# Altium PCB RefPoint01-00.PcbDoc
Units mm, origin at the board's own origin, x right, y up, seen from the top; angles counter-clockwise.
Board outline 52 x 86 mm, 2 copper layers (Top Layer, Bottom Layer); 52 components, 43 nets, 164 pads, 58 vias.
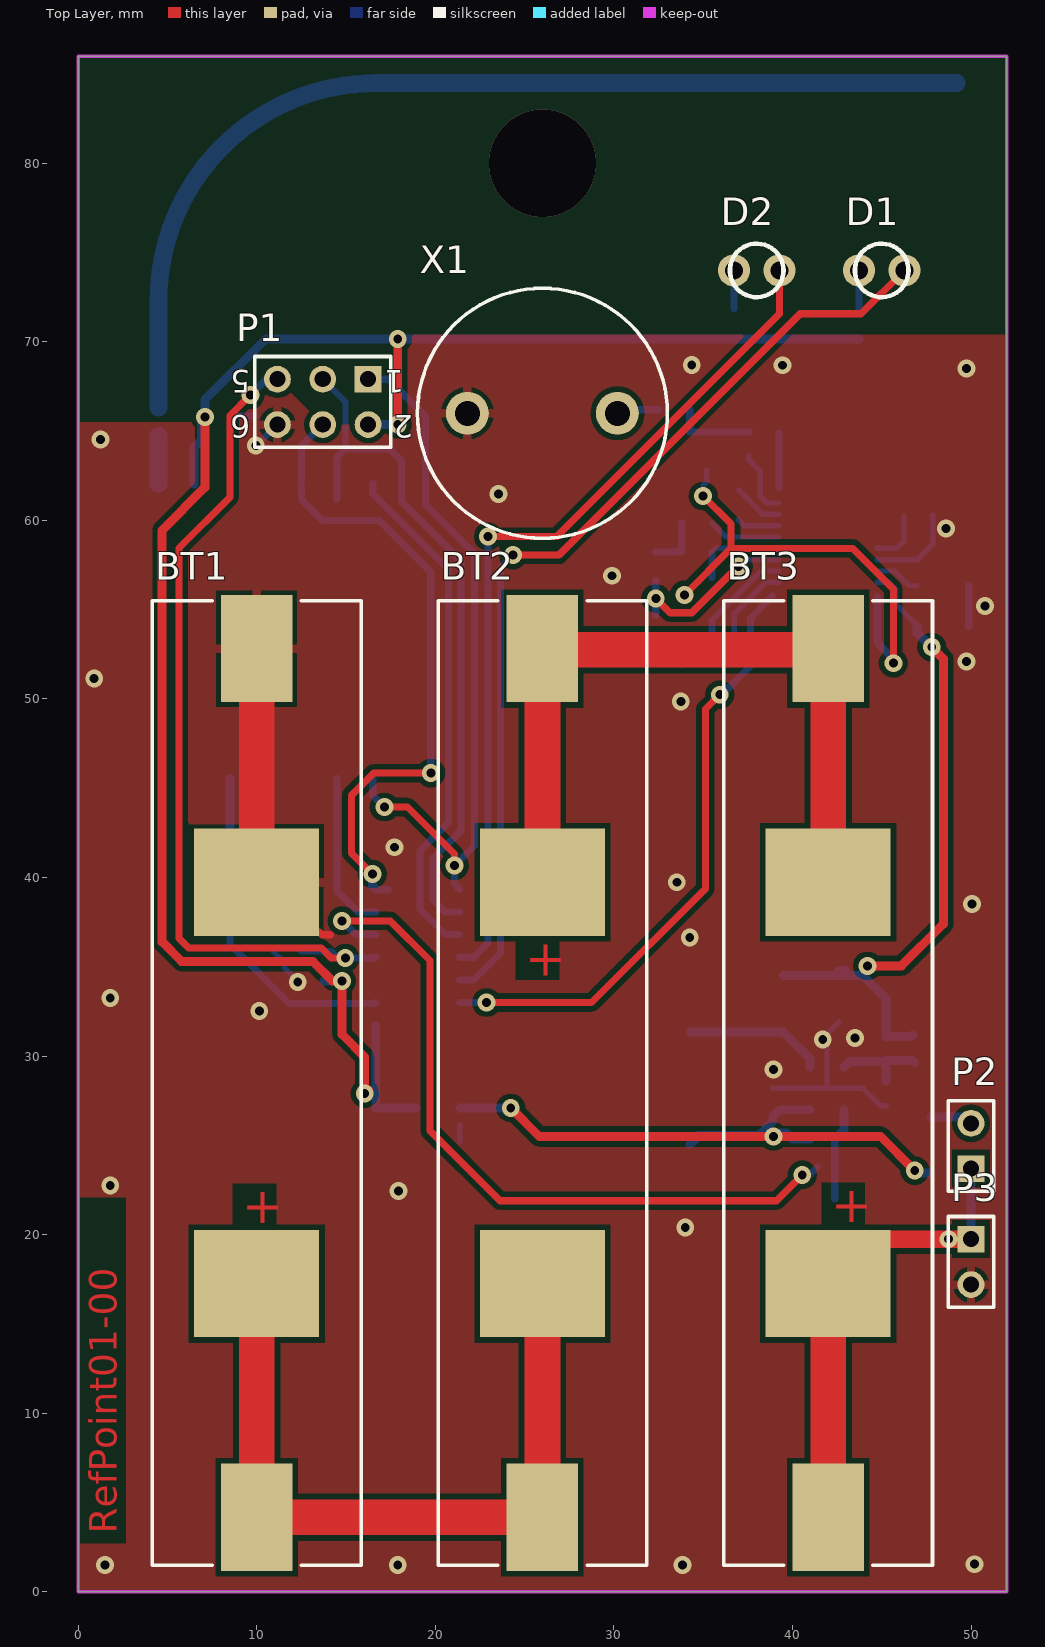
[diagram p0: Top Layer view]
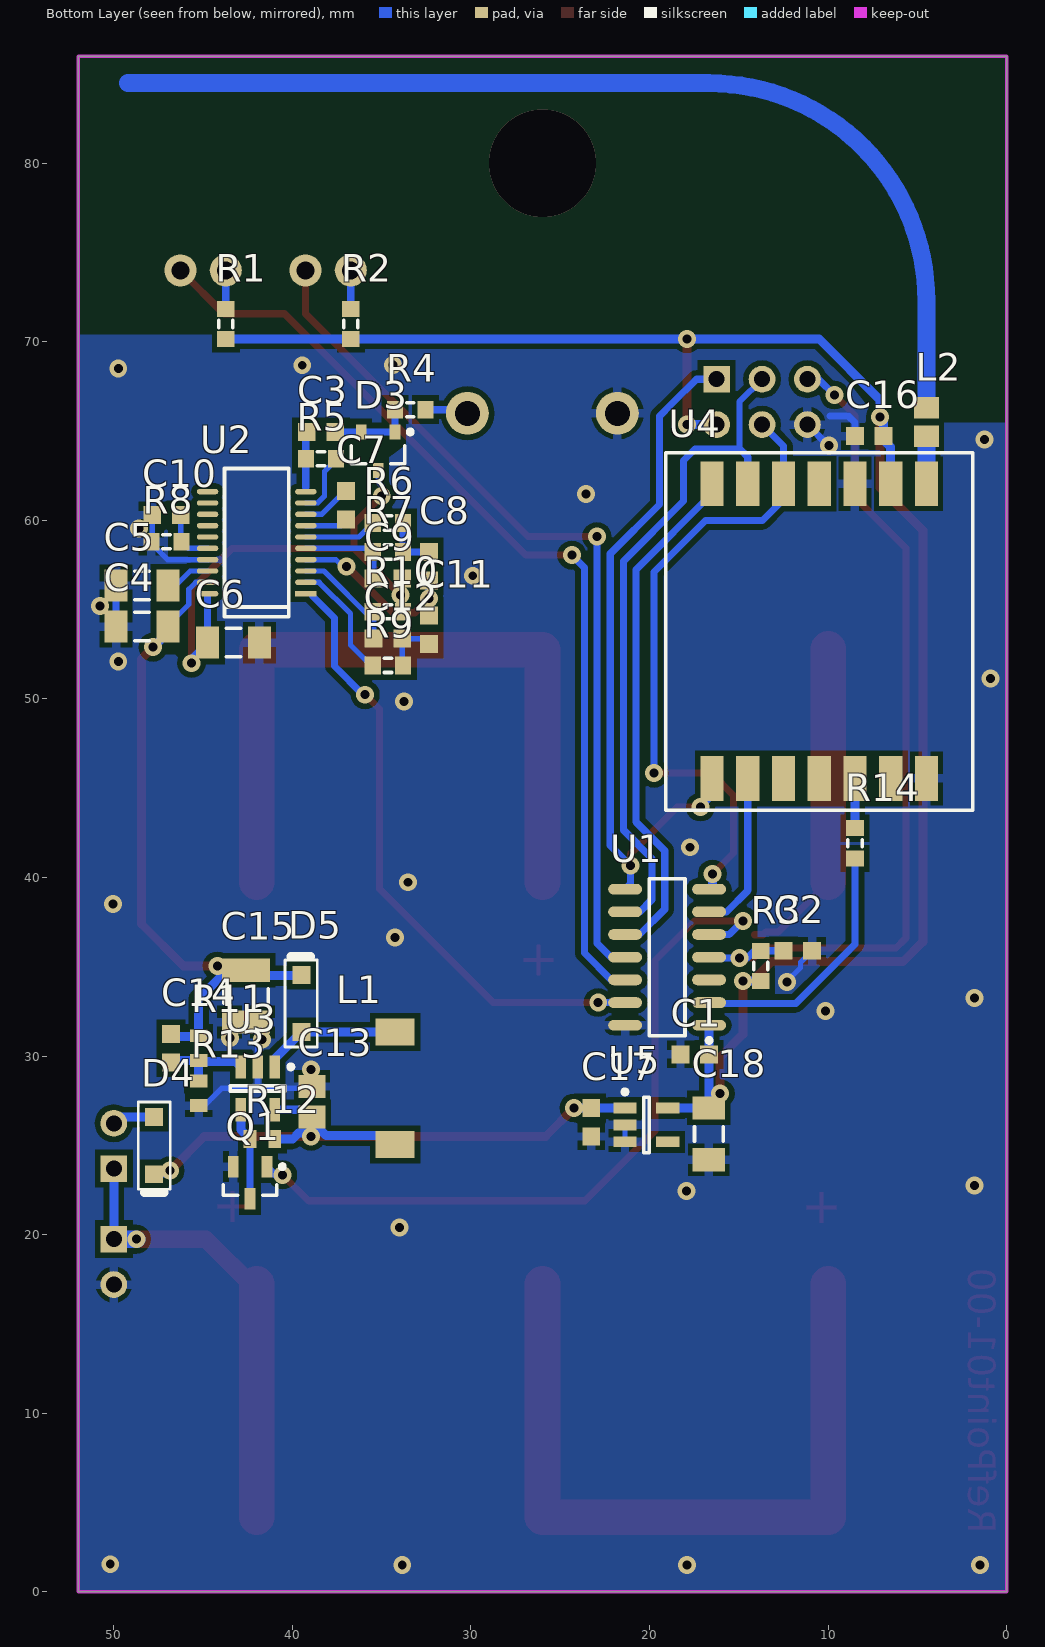
[diagram p1: Bottom Layer view, seen from below]

## Layer stack, top to bottom
Top Solder: solder mask 0.0102, Solder Resist, Dk 3.5
Top Layer: signal copper 0.0356
Dielectric1: dielectric 0.32, FR-4, Dk 4.8
Bottom Layer: signal copper 0.0356
Bottom Solder: solder mask 0.0102, Solder Resist, Dk 3.5

## Board outline
0,0 0,86 52,86 52,0

## Design rules (kind name [scope] priority, off if disabled: settings)
Clearance KeepOut [InPolygon vs OnLayer('Keep-Out Layer')] p1: gap=0.01
Clearance [All] p2: gap=0.3
FabricationTestPointUsage TestPointUsage [All] p1: valid=0 allowmultiple=FALSE
FabricationTestpoint Testpoint [All] p1: side=3 testpointundercomponent=TRUE minsize=1.016 maxsize=2.54 preferedsize=1.524 minholesize=0 maxholesize=1.016 preferedholesize=0.813 testpointgrid=0.025 allowsidetop=TRUE allowsidebottom=TRUE usegrid=TRUE gridtolerance=0
HoleSize [All] p1: absolutevalues=TRUE maxlimit=6 minlimit=0.025 maxpercent=80.000 minpercent=20.000
PolygonConnect PolygonConnect_1 [All vs IsVia] p1: connectstyle=Direct reliefconductorwidth=0.254 reliefentries=4 polygonreliefangle="90 Angle" airgapwidth=0.254
PolygonConnect [All] p2: connectstyle=Relief reliefconductorwidth=0.5 reliefentries=4 polygonreliefangle="90 Angle" airgapwidth=0.254
RoomDefinition RefPoint01-00 [InComponentClass('RefPoint01-00')] p1: confinementstyle=ConfineIn formatcopy=TRUE lockcomponents=FALSE outline -7.25,-9.2 60.35,-9.2 60.35,91.3 -7.25,91.3
RoutingVias [All] p1: holewidth=0.711 width=1.27 viastyle="Through Hole" minholewidth=0.711 minwidth=1.27 maxholewidth=0.711 maxwidth=1.27
SilkToSolderMaskClearance SilkscreenOverComponentPads [IsPad] p1 off: minsilkscreentomaskgap=0.254 clearancetoexposedcopper=TRUE
SolderMaskExpansion [All] p1: expansion=0.102
Width [All] p1: maxlimit=2 minlimit=0.25 preferedwidth=0.4
26 further rules are at their usual default settings.

## Components (designator, comment, footprint, x,y, rotation, side; value= is the part's Value field where it differs from the comment)
BT1 "AAA Battery" "Keystone 55 AAA CLIP" 10,28.5 r270 top locked
BT2 "AAA Battery" "Keystone 55 AAA CLIP" 26,28.5 r90 top locked
BT3 "AAA Battery" "Keystone 55 AAA CLIP" 42,28.5 r270 top locked
C1 "150nF" CAPC1608N 17.466,30.1 r180 bottom
C2 "10pF" CAPC1608N 11.7,35.9 r0 bottom
C3 "470pF" CAPC1608N 38.4,64.954 r180 bottom
C4 "10uF" CAPC3216N 48.42,54.054 r180 bottom
C5 "10uF" CAPC3216N 48.42,56.354 r180 bottom
C6 "10uF" CAPC3216N 43.3,53.154 r0 bottom
C7 "10pF" CAPC1608N 37,60.854 r270 bottom
C8 "2200pF" CAPC1608N 32.35,57.436 r90 bottom
C9 "470pF" CAPC1608N 34.65,56.754 r0 bottom
C10 "4700pF" CAPC1608N 47.05,60.304 r180 bottom
C11 "680pF" CAPC1608N 32.35,53.882 r270 bottom
C12 "680pF" CAPC1608N 34.65,53.382 r0 bottom
C13 "2.2uF" CAPC2012N 38.9,27.45 r270 bottom
C14 "330 pF" CAPC1608N 46.8,30.45 r90 bottom
C15 "4.7uF" CAPC3225N 42.6,33.36 r90 bottom
C16 "150nF" CAPC1608N 7.7,64.719 r180 bottom
C17 "150nF" CAPC1608N 23.264,26.3 r90 bottom
C18 "10uF" CAPC3216N 16.683,25.65 r90 bottom
D1 "LED" "LED 3MM DIP" 45,74 r0 top
D2 "LED" "LED 3MM DIP" 38,74 r0 top
D3 "BAV99" SOT95P240-3L 35.2,63.879 r270 bottom
D4 "BAT42W" SOD123 47.75,24.99 r90 bottom (schematic designator D5)
D5 "BAT42W" SOD123 39.5,32.95 r270 bottom
L1 "22uH" INDM7070x32N 34.25,28.2 r270 bottom
L2 "Inductor" INDC2012L 4.5,65.519 r90 bottom
P1 "AVR ISP" HDR2X3 16.24,67.909 r180 top
P2 "Power Button" HDR1X2 50,23.7 r270 top
P3 "Ex. Source" HDR1X2 50,19.75 r90 top
Q1 "2N7002K" SOT23-3L 42.37,22.91 r270 bottom
R1 "1k5" RESC1608N 43.73,71 r270 bottom
R2 "1k5" RESC1608N 36.73,71 r270 bottom
R3 "10k" RESC1608N 13.777,35.05 r270 bottom
R4 "3k9" RESC1608N 33.4,66.2 r180 bottom
R5 "300k" RESC1608N 38.4,63.454 r0 bottom
R6 "4k7" RESC1608N 34.65,59.854 r0 bottom
R7 "4k7" RESC1608N 34.65,58.236 r0 bottom
R8 "4k7" RESC1608N 47.05,58.804 r180 bottom
R9 "2k7" RESC1608N 34.65,51.882 r180 bottom
R10 "13k" RESC1608N 34.65,54.882 r180 bottom
R11 "51k" RESC1608X50N 45.25,30.45 r270 bottom
R12 "51k" RESC1608X50N 41.68,25.36 r0 bottom
R13 "13k3" RESC1608X50N 45.25,27.92 r90 bottom
R14 "33R" RESC1608N 8.5,41.919 r90 bottom
U1 "ATtiny24A-SSU" SOIC14T_L 19.016,35.54 r0 bottom
U2 "PW0268" QSSOP20_0.635/4.0X8.7 42,58.754 r90 bottom
U3 "LMR62014" SOT23-5AM 41.94,28.2 r270 bottom
U4 "ALPHA-TRX433S" ALPHA-TRX 10.5,53.8 r180 bottom locked
U5 "TPS76933" SOT23-5AM 20.177,26.15 r180 bottom
X1 "Xduct" XDUCTS1 26,66 r180 top

## Footprints (in the part's own frame and the unit in brackets; to place one, negate y for a bottom-side part, rotate by r counter-clockwise, add the part's x,y. Pads: shape width x height; smd on the part's side, far side on the other; paste and mask are expansions set on the pad)
ALPHA-TRX [mm] "ALPHA RF MODULES"
  rect 1.3x2.5 smd: 1(-6,-8.25) 2(-4,-8.25) 3(-2,-8.25) 4(0,-8.25) 5(2,-8.25) 6(4,-8.25) 7(6,-8.25) 8(6,8.25) 9(4,8.25) 10(2,8.25) 11(0,8.25) 12(-2,8.25) 13(-4,8.25) 14(-6,8.25)
  silkscreen extent -8.6,-10.03 8.6,10
CAPC1608N [mm] "Chip Capacitor, Body 1.6x0.8mm(0603), IPC Medium Density"
  rect 1x1 smd: 1(-0.8,0) 2(0.8,0)
  body extent -0.8,-0.4 0.8,0.4, height 0.55
CAPC2012N [mm] "Chip Capacitor, Body 2.0x1.3mm(C0805), IPC Medium Density"
  rect 1.3x1.5 smd: 1(-0.85,0) 2(0.85,0)
  body extent -1.1,-0.73 1.1,0.73, height 1.1
CAPC3216N [mm] "Chip Capacitor, Body 3.2x1.6mm, IPC Medium Density"
  rect 1.3x1.8 smd: 1(-1.45,0) 2(1.45,0)
  silkscreen extent -0.4,-0.8 0.4,0.8, body extent -1.6,-0.8 1.6,0.8, height 0.7
CAPC3225N [mm] "Chip Capacitor, Body 3.2x2.5mm, IPC Medium Density"
  rect 1.3x2.7 smd: 1(-1.45,0) 2(1.45,0)
  silkscreen extent -0.4,-1.25 0.4,1.25, body extent -1.7,-1.35 1.7,1.35, height 1.35
HDR1X2 [mm] "Connector; Header; 2 Position"
  rect 1.5x1.5 hole 0.9: 1(0,0)
  round 1.5 hole 0.9: 2(-2.54,0)
  silkscreen extent -3.81,-1.27 1.27,1.27
HDR2X3 [mm] "Connector; Header; 3x2 Position"
  rect 1.5x1.5 hole 0.9: 1(0,0)
  round 1.5 hole 0.9: 2(0,2.54) 3(2.54,0) 4(2.54,2.54) 5(5.08,0) 6(5.08,2.54)
  silkscreen extent -1.27,-1.27 6.35,3.81
INDC2012L [mm] "Chip Inductor, Body 2.0x1.2mm, IPC High Density"
  rect 1.2x1.4 smd: 1(-0.8,0) 2(0.8,0)
  body extent -1.1,-0.7 1.1,0.7, height 1.1
INDM7070x32N [mm] "Inductor 7x7x3.2mm"
  rect 1.5x2.2 smd: 1(-3.15,0) 2(3.15,0)
"Keystone 55 AAA CLIP" [mm] "KEYSTONE 55 BATTERY CLIP AAA"
  rect 6x4 smd: 1(-24.32,0) 2(24.32,0)
  rect 6x7 smd: 1(-11.24,0) 2(11.24,0)
  silkscreen extent -27,-5.84 27,5.84, body extent -26.29,-5.57 26.29,5.57, height 13.19
"LED 3MM DIP" [mm]
  round 1.8 hole 1: 1(-1.27,0) 2(1.27,0)
  silkscreen extent -1.5,-1.5 1.5,1.5, body extent -1.58,-1.75 1.75,1.75, height 6.51
QSSOP20_0.635/4.0X8.7 [mm]
  rect 0.3x1.2 smd paste-0.02 mask+0.05: 1(-2.857,-2.75)
  oval 0.3x1.2 smd paste-0.02 mask+0.05: 2(-2.222,-2.75) 3(-1.588,-2.75) 4(-0.953,-2.75) 5(-0.318,-2.75) 6(0.317,-2.75) 7(0.952,-2.75) 8(1.587,-2.75) 9(2.222,-2.75) 10(2.857,-2.75) 11(2.857,2.75) 12(2.222,2.75) 13(1.588,2.75) 14(0.953,2.75) 15(0.318,2.75) 16(-0.317,2.75) 17(-0.952,2.75) 18(-1.587,2.75) 19(-2.222,2.75) 20(-2.857,2.75)
  silkscreen extent -4.15,-1.8 4.15,1.8, body extent -4.15,-2.05 4.15,2.05, height 1.75
RESC1608N [mm] "Chip Resistor, Body 1.6x0.8mm, IPC Medium Density"
  rect 0.9x1 smd: 1(-0.85,0) 2(0.85,0)
  silkscreen extent -0.2,-0.4 0.2,0.4, body extent -0.8,-0.4 0.8,0.4, height 0.38
RESC1608X50N [mm] "Chip Resistor, EIA 0603, Metric 1608, Body 1.6x0.8mm, IPC Medium Density"
  rect 0.72x0.99 smd: 1(-0.69,0) 2(0.69,0)
  body extent -0.87,-0.47 0.88,0.48, height 0.5
SOD123 [mm]
  rect 1x1 smd paste-0.02 mask+0.05: 1(1.6,0) 2(-1.6,0)
  silkscreen extent -2.63,-0.91 2.44,0.89, body extent -1.95,-0.9 1.95,0.9, height 1.29
SOIC14T_L [mm] "14-Pin Small Outline Integrated Circuit 1.27 mm Pitch, IPC High Density"
  oval 1.9x0.6 smd: 1(-2.35,3.81) 2(-2.35,2.54) 3(-2.35,1.27) 4(-2.35,0) 5(-2.35,-1.27) 6(-2.35,-2.54) 7(-2.35,-3.81) 8(2.35,-3.81) 9(2.35,-2.54) 10(2.35,-1.27) 11(2.35,0) 12(2.35,1.27) 13(2.35,2.54) 14(2.35,3.81)
  silkscreen extent -2.47,-4.4 1,4.78, body extent -1.95,-4.33 1.95,4.33, height 1.91
SOT23-3L [mm] "SOT23, 3-Leads, Body 2.9x1.3mm, Pitch 0.95mm, Lead Span 2.5mm, IPC High Density"
  rect 1.2x0.6 smd: 1(-0.9,0.95) 2(-0.9,-0.95) 3(0.9,0)
  silkscreen extent -1.02,-1.5 0.7,1.92, body extent -1.32,-1.5 1.32,1.5, height 1.08
SOT23-5AM [mm] "SOT23, 5-Leads, Body 2.9x1.7mm, Pitch 0.95mm, Lead Span 2.8mm, IPC Low Density"
  rect 1.3x0.6 smd: 1(-1.2,0.95) 2(-1.2,0) 3(-1.2,-0.95) 4(1.2,-0.95) 5(1.2,0.95)
  silkscreen extent -1.32,-1.55 0.15,1.97, body extent -0.9,-1.55 0.9,1.55, height 1.45
SOT95P240-3L [mm] "SOT23, 3-Leads, Body 2.9x1.3mm, Pitch 0.95mm, Lead Span 2.4mm, IPC High Density"
  rect 0.85x0.6 smd: 1(-1.075,0.95) 2(-1.075,-0.95) 3(1.075,0)
  silkscreen extent -1.2,-1.5 0.7,1.92, body extent -0.7,-1.5 0.7,1.5, height 1.12
XDUCTS1 [mm] "400ST/R120"
  round 2.4 hole 1.4: 1(-4.2,0) 2(4.2,0)
  silkscreen extent -7,-7 7,7, body extent -6.35,-6.35 6.35,6.35, height 20

## Part data
BT1 BT2 BT3: library part Battery_AAA, "Battery AAA"
C1 C16 C17: library part C0000001, "MLCC, 150nF 16V -20+80% Y5V"
C2 C7: library part C0000042, "MLCC, 0603, NP0, 50V, 10PF"
C3 C9: library part C0000062, "MLCC, 470pF 50V C0G 5% 0603"
C4 C5 C6 C18: library part C0000011, "MLCC, 10uF 25V -20%, +80% Y5V 1206"
C8: library part C0000126, "MLCC, 2200pF 50V X7R 5% 0603"
C10: library part C0000127, "MLCC, 4700pF 50V X7R 5% 0603"
C11 C12: library part C0000125, "MLCC, 680pF 50V C0G / NP0 5% 0603"
C13: library part C0000129, "MLCC, 2.2uF 16V X7R 0805"
C14: library part C0000018, "MLCC, 50V, 330pF, 10%, X7R, 0603"
C15: library part C0000130, "MLCC, 4.7uF 16V X7R 1210"
D1 D2: library part LED0, "Typical INFRARED GaAs LED"
D3: library part D0000001, "DIODE SW DUAL 75V 350mW SOT23"
D4 D5: library part D0000003, "Diode Schottkey, 30V, Vf=1V, If=1A, rrt=5ns, SOD123, -55°C to +125°C"
L1: library part "L Inductor 810-SLF732220MR962PF", "Inductor"
P1: "Header, 6-Pin"
P2: "Header, 2-Pin, Right Angle"
P3: library part Maitinimas, "Header, 2-Pin"
Q1: library part Q0000008, "MOSFET N-CH 60V 340MA SOT23"
R1 R2: library part R2406076, "1K5 5% 0603 1/10W"
R3: library part R0000008, "Res, 10K 0.063W 75V 1%  0603"
R4: library part R2406086, "3K9 5% 0603 1/10W"
R5: library part R2406131, "300K 5% 0603 1/10W"
R6 R7 R8: library part R2406088, "Res, 4K7 5% 0603 1/10W"
R9: library part R2406082, "2K7 5% 0603 1/10W"
R10: library part R2406099, "13K 5% 0603 1/10W"
R11 R12: library part R0000522, "Res, 51K, 0603 (1608 metric), ±1%, 100mW, 75V"
R13: library part R0000455, "Res, 13K3, 0603 (1608 metric), ±1%, 100mW, 75V"
R14: library part R2406036, "33R 5% 0603 1/10W"
U3: "2064695"
U4: "RF SOLUTIONS  ALPHA-TRX433S  RF MODULE, TRANSCEIVER, FSK, 433MHZ"
U5: library part TPS769xx, "ULTRALOW-POWER 100-mA LOW-DROPOUT LINEAR REGULATORS"
X1: library part Xduct1, "Transducer"

## Via types
v1: diameter 1, hole 0.5, Top Layer to Bottom Layer, 57 vias
v2: diameter 6, hole 6, Top Layer to Bottom Layer, 1 vias

## Nets (pads, with @x,y where several pads share a name; then routed paths per layer and width w, separated by ;. In a path a pad name is that pad's centre, name@x,y a point inside that pad or via, vN(x,y) a via of type N, cw(c..) or ccw(c..) an arc to the next point about the centre after c; other vN are vias at no path point)
+3.3V: C1.2 C16.2 C18.2 P1.2 R1.2 R2.2 R3.2 U1.1 U4.9 U5.5 | length 105.5
  Top Layer w0.5: v1(7.1,65.8) 7.1,61.85 4.7,59.45 4.7,36.4 5.8,35.3 13.152,35.3 14.252,34.2 v1(14.777,34.2) 14.777,31.223 16.05,29.95 16.05,28.3 v1@16.25,28.1 ; v1(17.9,65.369) v1(17.9,70.159)
  Bottom Layer w0.5: U4.9 6.5,64.1 6.9,64.5 C16.2 6.9,65.6 v1(7.1,65.8) 7.1,66.75 10.509,70.159 v1(17.9,70.159) 36.721,70.159 R2.2 R1.2 ; R3.2 v1(14.777,34.2) ; P1.2 v1(17.9,65.369) ; U1.1 16.666,27.127 16.639,27.1 C18.2 U5.5@18.927,27.1
  other v1: 16.05,27.9
+4.5V: C13.2 C17.2 D4.2 L1.2 R12.1 U3.5 U5.1 | length 38
  Top Layer w0.5: v1(24.227,27.1) 25.827,25.5 v1(38.95,25.5) 44.94,25.5 v1(46.85,23.59)
  Bottom Layer w0.5: U5.1 v1(24.227,27.1) ; L1.2 34.75,25.55 38.1,25.55 C13.2@38.9,26.35 ; C13.2 39.3,27 U3.5 ; v1(38.95,25.5) 38.75,25.7 39.65,25.7 39.99,25.36 R12.1 ; v1@46.836,23.45 47.69,23.45 D4.2@47.74,23.4
+6V: C4.2 C14.2 C15.2 D5.2 R11.1 U2.19 | length 36.3
  Top Layer w0.5: v1(44.2,35.05) 46.1,35.05 48.45,37.4 48.45,52.254 v1(47.8,52.904)
  Bottom Layer w0.3: U2.19 45.414,56.531 45.8,56.145 45.8,55.304 C4.2@46.82,54.284
  Bottom Layer w0.5: D5.2@39.5,34.51 43.95,34.51 45.25,33.21 45.25,31.09 46.64,31.09 C14.2@46.75,31.2 ; C15.2 C15.2@42.96,34.81 ; C4.2 46.97,53.734 v1(47.8,52.904)
CLK: R14.1 U1.2 | length 14.4
  Bottom Layer w0.4: R14.1 8.5,36.263 11.813,32.95 16.616,32.95 U1.2
GND: BT1.1 C1.1 C2.1 C4.1 C5.1 C6.1 C10.1 C13.1 C15.1 C16.1 C17.1 C18.1 P1.6 P3.2 Q1.2 R8.1 R13.1 U1.14 U2.17 U3.2 U4.7 U4.10 U5.2 U5.3 X1.2 | length 43.9
  Top Layer w0.4: BT1.1@10,39.74 12.79,36.95 13.5,36.95 13.654,36.796 14.123,36.796
  Top Layer w2: BT1.1@10,39.74 BT1.1@10,52.82
  Bottom Layer w0.3: C2.1 11.55,35.25 11.55,34.95 12.3,34.2 v1(12.3,34.15) ; U5.3 U5.2 ; C13.1@38.9,28.2 41.94,28.2 ; C15.1 41.94,31.25 U3.2 41.94,28.2 ; U2.17 46.997,57.801 47.9,58.704 47.85,58.754 C10.1 ; R13.1 44.93,27.23 43.96,28.2 41.94,28.2
  Bottom Layer w0.4: C16.1 8.5,65.477 8.873,65.85 9.89,65.85 ; v1(9.95,64.2) 9.991,64.2 P1.6 ; C4.1 C5.1
  other v1: 1.5,1.5 17.9,1.5 33.85,1.5 50.2,1.55 34,20.4 17.941,22.45 1.8,22.75 38.95,29.26 41.7,30.925 43.5,31.01 10.146,32.529 1.8,33.25 34.25,36.65 50.05,38.511 33.525,39.74 17.727,41.7 33.75,49.85 0.9,51.15 49.75,52.1 50.774,55.2 29.9,56.9 48.6,59.554 23.55,61.474 1.25,64.529 49.75,68.5 34.364,68.7 39.45,68.689
MISO: P1.1 U1.8 U4.1 | length 39.8
  Top Layer w0.4: v1(17.15,43.95) 18.45,43.95 21.077,41.323 v1(21.077,40.669)
  Bottom Layer w0.4: P1.1 17.374,67.909 18.743,66.54 19.45,65.833 19.45,60.886 22.2,58.136 22.2,41.792 v1(21.077,40.669) 21.077,39.639 U1.8 ; U4.1 16.5,44.6 v1(17.15,43.95)
MOSI: P1.4 U1.7 U4.12 | length 36.1
  Top Layer w0.4: v1(16.477,40.201) 15.3,41.378 15.3,44.6 16.55,45.85 v1(19.75,45.85)
  Bottom Layer w0.4: U4.12@12.5,61.75 12.5,61.168 13.668,60 16.864,60 19.75,57.114 v1(19.75,45.85) ; U4.12 12.5,64.169 P1.4 ; U1.7@16.697,39.32 U1.7@17.385,39.32
  Bottom Layer w0.5: v1(16.477,40.201) 16.477,39.539 U1.7
NetBT1_2: BT1.2 BT2.1 | length 42.2
  Top Layer w2: BT1.2@10,17.26 10,4.18 26,4.18 BT2.1@26,17.26
NetBT2_2: BT2.2 BT3.1 | length 42
  Top Layer w2: BT2.2@26,39.74 26,52.763 42,52.763 BT3.1@42,39.74
NetC3_1: C3.1 R5.2 U2.10 | length 3.1
  Bottom Layer w0.4: 39.25,61.834 R5.2 C3.1@39.25,64.904
NetC3_2: C3.2 D3.1 D3.2 R4.1 | length 4.6
  Bottom Layer w0.4: R4.1 D3.1 D3.2 C3.2
NetC7_1: C7.1 U2.8 | length 2.8
  Bottom Layer w0.3: C7.1@36.997,61.707 38.363,60.341 U2.8
NetC7_2: C7.2 U2.7 | length 2.4
  Bottom Layer w0.3: C7.2@36.975,60.029 37.298,59.706 U2.7
NetC8_1: C8.1 C11.1 U2.4 | length 10.4
  Top Layer w0.4: v1(32.35,55.632) 33.15,54.832 34.364,54.832 36.962,57.429 v1(36.975,57.429)
  Bottom Layer w0.3: v1(36.975,57.429) 37.199,57.429 37.571,57.801 U2.4
  Bottom Layer w0.4: C11.1 v1(32.35,55.632) C8.1@32.35,56.632
NetC8_2: C8.2 R6.1 R7.1 | length 3
  Bottom Layer w0.4: C8.2 R7.1 ; R7.1@33.8,58.336 R6.1
NetC9_2: C9.2 R7.2 U2.5 | length 5.5
  Bottom Layer w0.3: C9.2 C9.2@35.5,56.804 ; R7.2@35.6,58.336 R7.2 35.7,58.436 U2.5
  Bottom Layer w0.4: C9.2@35.5,56.804 R7.2
NetC10_2: C10.2 R8.2 U2.16 | length 3
  Bottom Layer w0.3: U2.16 45.832,58.436 46.25,58.854 C10.2@46.25,60.204
NetC11_2: C11.2 C12.1 R9.2 | length 3.2
  Bottom Layer w0.3: C11.2 32.65,53.382 C12.1 C12.1@33.85,53.132 ; R9.2 33.85,51.932 C12.1@33.85,53.132 ; C12.1@33.8,53.182 C12.1@33.85,53.132
NetC12_2: C12.2 R10.1 U2.3 | length 5.9
  Bottom Layer w0.3: R10.1@35.5,54.432 38.235,57.166 U2.3
  Bottom Layer w0.4: C12.2@35.5,53.382 R10.1@35.5,54.432
NetC14_1: C14.1 R11.2 R13.2 U3.3 | length 5.2
  Bottom Layer w0.5: U3.3 43.2,29.71 R11.2@45.25,29.71 ; R13.2 R11.2@45.25,29.71 ; C14.1 46.69,29.76 R11.2 R11.2@45.25,29.71
NetD1_1: D1.1 R1.1 | length 2.1
  Bottom Layer w0.4: R1.1 D1.1
NetD1_2: D1.2 U1.12 | length 54
  Top Layer w0.4: v1(24.35,58.054) 26.919,58.054 40.435,71.57 43.84,71.57 D1.2
  Bottom Layer w0.4: U1.12 22.147,34.27 23.65,35.773 23.65,57.354 v1(24.35,58.054)
NetD2_1: D2.1 R2.1 | length 2.2
  Bottom Layer w0.4: R2.1 D2.1
NetD2_2: D2.2 U1.11 | length 48.8
  Top Layer w0.4: v1(22.95,59.1) 26.8,59.1 39.27,71.57 D2.2
  Bottom Layer w0.4: U1.11 22.167,35.54 22.95,36.323 v1@22.95,59.304
NetD4_1: D4.1 P2.2 | length 2.5
  Bottom Layer w0.5: D4.1 P2.2@50.2,26.59
NetD5_1: D5.1 L1.1 U3.1 | length 7.8
  Bottom Layer w0.5: L1.1 D5.1 40.99,29.86 U3.1
NetE1_1: L2.2 | length 57.6
  Bottom Layer w1: L2.2 4.5,72.315 cw(c16.663,72.315) 16.663,84.479 ; 16.663,84.5 49.2,84.5
NetL2_1: L2.1 U4.8 | length 2.7
  Bottom Layer w1: U4.8 L2.1
NetQ1_3: Q1.3 R12.2 U3.4 | length 5.2
  Bottom Layer w0.4: Q1.3 R12.2
  Bottom Layer w0.5: R12.2 42.89,25.88 U3.4
NetR4_2: R4.2 X1.1 | length 2.6
  Bottom Layer w0.4: X1.1@30.2,65.6 30.8,66.2 R4.2
NetR5_1: R5.1 U2.9 | length 3.7
  Bottom Layer w0.3: R5.1@37.55,63.604 37.55,63.4 38.2,62.75 38.2,61.363 38.586,60.976 U2.9
NetR6_2: R6.2 U2.6 | length 4.1
  Bottom Layer w0.3: R6.2 36.283,59.071 U2.6
NetR9_1: R9.1 U2.2 | length 6.7
  Bottom Layer w0.3: R9.1 35.575,51.957 35.675,51.957 36.75,53.032 36.75,54.783 38.499,56.531 U2.2
NetR14_2: R14.2 U4.5 | length 2.8
  Bottom Layer w0.5: R14.2 U4.5
NIRQ: U1.6 U4.2 | length 8.9
  Bottom Layer w0.4: U4.2 14.5,39.266 15.686,38.08 U1.6
NSEL: U1.10 U4.14 | length 29
  Bottom Layer w0.4: U4.14 16.5,61.5 20.75,57.25 20.75,43.103 19.15,41.503 19.15,38.227 20.567,36.81 U1.10
PW0268: U1.13 U2.1 | length 34.4
  Top Layer w0.4: v1(22.877,33) 28.75,33 35.125,39.375 35.125,49.436 v1(35.93,50.241)
  Bottom Layer w0.4: U1.13 v1(22.877,33) ; v1(35.93,50.241) 36.046,50.241 37.65,51.845 37.65,54.541 U2.1@38.874,55.765
RST: C2.2 P1.5 R3.1 U1.4 | length 48.1
  Top Layer w0.4: v1(9.644,67.019) 8.5,65.875 8.5,61.3 5.65,58.45 5.65,36.6 6.198,36.052 13.627,36.052 14.179,35.5 v1(14.963,35.5) v1@14.861,35.602
  Bottom Layer w0.4: v1(9.644,67.019) 10.534,67.909 P1.5 ; C2.2 R3.1@13.727,35.9 ; R3.1@13.777,35.85 14.177,35.85 14.527,35.5 v1(14.963,35.5) 16.626,35.5 U1.4
SCK: P1.3 U1.9 U4.13 | length 39.3
  Bottom Layer w0.35: P1.3 14.97,66.639 14.97,64.03 14.94,64
  Bottom Layer w0.4: U4.13@14.5,61.2 U4.13 14.5,63.56 14.94,64 17.45,64 18.1,63.35 18.1,61.079 21.45,57.729 21.45,42.65 19.873,41.073 19.873,38.754 20.547,38.08 U1.9
SHDN: Q1.1 U1.5 | length 41.7
  Top Layer w0.4: v1(14.777,37.575) 17.481,37.575 19.7,35.356 19.7,25.823 23.623,21.9 39.1,21.9 v1(40.55,23.35)
  Bottom Layer w0.4: v1(14.777,37.575) 15.542,36.81 U1.5 ; v1(40.55,23.35) 40.96,23.35 Q1.1@41.41,23.8
VCC: BT3.2 P2.1 P3.1 | length 26.9
  Top Layer w1: BT3.2@42,16.9 44.85,19.75 v1@48.65,19.75 ; v1(48.73,19.75) P3.1
  Top Layer w2: BT3.2@42,4.18 BT3.2@42,17.26
  Bottom Layer w0.5: P3.1 P2.1@50,23.2
  Bottom Layer w1: v1(48.73,19.75) P3.1
VREF: C6.2 C9.1 D3.3 R10.2 U2.20 | length 27.1
  Top Layer w0.4: v1(33.95,55.832) 36.555,58.436 ; v1(35,61.363) 36.555,59.808 36.555,58.436 ; v1(45.65,52.004) 45.65,56.155 43.368,58.436 36.555,58.436
  Bottom Layer w0.3: v1(35,61.363) 35,61.95 35.2,62.15 D3.3
  Bottom Layer w0.4: 44.75,55.739 C6.2 45.65,52.254 v1(45.65,52.004)
VREG: C5.2 U2.18 | length 2.6
  Bottom Layer w0.3: U2.18 45.72,57.166 46.532,56.354 C5.2
pads on no net: U1.3 U2.11 U2.12 U2.13 U2.14 U2.15 U4.3 U4.4 U4.6 U4.11 U5.4
copper on no net:
  other v2: 26,80

## Polygon pours and split planes (outlines as drawn)
GND on Top Layer "Top Layer GND" (solid, remove dead copper, pour order 0): 0,0 0,65.5 8.5,65.5 10.3,70.4 10.534,70.4 52,70.4 52,0
GND on Bottom Layer "Bottom Layer GND" (solid, remove dead copper, pour order 2): 0,0 0,65.483 7.056,65.483 11,70.4 52,70.4 52,0

## Keep-outs
Keep-Out Layer:
  the board outline again, w0.2

## Other copper
Top Layer:
  pour cut-out: 11.16,67.909 13.7,65.369 16.24,65.369 16.24,67.909
  text "+" at 25.049,34.5 h2
  text "+" at 42.18,20.7 h2
  text "+" at 9.2,20.65 h2
  text "RefPoint01-00" at 2.15,3.25 h1.52 r90
Bottom Layer:
  pour cut-out: 46.379,52.333 46.547,52.501 47.397,52.501 47.8,52.904 46.55,52.904 45.65,52.004
  pour cut-out: 34.6,63.529 33.65,64.229 34.25,64.954 36.15,64.954 35.2,62.804
  pour cut-out: 33.05,51.082 35.537,51.082 35.5,51.118 35.5,51.882 35.45,52.282 33.05,52.282
  pour cut-out: 12.977,34.95 13.97,35.943 13.97,37.575 14.777,37.575 14.777,34.2

## Silkscreen, mask and mechanical layers (free items; w line width, h text height)
Bottom Overlay:
  text ".Legend" at -24.419,-43.319 h2
Mechanical 2:
  text ".Layer_Name" at -24.344,-46.323 h0.75
Mechanical 16:
  lines w0.127: -89.697,-19.824 -84.617,-19.824 ; -89.697,28.436 -84.617,28.436 ; -89.697,76.696 -84.617,76.696 ; -16.672,-68.084 -16.672,-63.004 ; -16.672,119.876 -16.672,124.956 ; 56.353,119.876 56.353,124.956 ; 83.023,-55.384 197.323,-55.384 ; 83.023,-47.764 197.323,-47.764 ; 83.023,-40.144 121.123,-40.144 ; 121.123,-63.004 121.123,-47.764 121.123,-32.524 ; 129.378,-68.084 129.378,-63.004 ; 129.378,119.876 129.378,124.956 ; 174.463,-63.004 174.463,-47.764 ; 197.323,-19.824 202.403,-19.824 ; 197.323,76.696 202.403,76.696 ; 83.023,-63.004 83.023,-32.524 ; 83.023,-63.004 197.323,-63.004 ; 83.023,-63.004 47.463,-63.004 47.463,-32.524 83.023,-32.524 ; 83.023,-32.524 121.123,-32.524 ; 121.123,-32.524 197.323,-32.524 197.323,-63.004 ; 197.323,-63.004 197.323,119.876 -84.617,119.876 -84.617,-63.004 197.323,-63.004 ; -89.697,-68.084 -89.697,124.956 202.403,124.956 202.403,-68.084 -89.697,-68.084
  text "1" at -53.451,121.527 h1.78
  text "2" at 19.193,121.527 h1.78
  text "3" at 92.345,121.527 h1.78
  text "4" at 165.243,121.527 h1.78
  text "A" at -87.792,98.515 h1.78
  text "A" at 199.228,98.515 h1.78
  text "B" at -87.792,50.458 h1.78
  text "B" at 199.228,50.458 h1.78
  text "C" at -87.792,1.944 h1.78
  text "C" at 199.228,1.944 h1.78
  text "TITLE" at 125.695,-29.222 h1.52
  text "ENGINEER:" at 84.293,-35.064 h1.14
  text "TITLE:" at 122.393,-35.064 h1.14
  text "Engineer" at 106.211,-38.239 h2.5
  text "PCB DESIGNER:" at 84.293,-42.557 h1.14
  text "D" at -87.792,-46.062 h1.78
  text "D" at 199.228,-46.062 h1.78
  text "PCB designer" at 101.358,-46.113 h2.5
  text "DATE:" at 84.293,-50.304 h1.14
  text "PART NO.:" at 122.393,-50.304 h1.14
  text "REV:" at 175.733,-50.304 h1.14
  text ".VariantName" at 132.807,-52.717 h1.52
  text ".PRINT_DATE" at 101.043,-53.606 h2.5
  text "FILE NAME:" at 84.293,-57.924 h1.14
  text "DWG NO:" at 122.393,-57.924 h1.14
  text "SCALE:" at 175.733,-57.924 h1.14
  text ".Printout_Name" at 132.807,-60.337 h1.52
  text ".Print_Scale" at 181.829,-60.337 h1.52
  text ".PCB_FILE_NAME_NO_PATH" at 84.928,-61.226 h2.5
  text "1" at -53.451,-66.433 h1.78
  text "2" at 19.193,-66.433 h1.78
  text "3" at 92.345,-66.433 h1.78
  text "4" at 165.243,-66.433 h1.78
Drill Drawing:
  text ".Legend" at -24.344,-48.323 h0.75

## Dimensions
52,0 to 52,86 on Mechanical 3
0,0 to 52,0 on Mechanical 3

## Text inside footprints (layer, text, board x,y; h text height)
P1: Top Overlay "6" at 9.636,65.877 h1.27 r180; Top Overlay "5" at 9.636,68.417 h1.27 r180; Top Overlay "2" at 18.78,65.877 h1.27 r180; Top Overlay "1" at 18.272,68.417 h1.27 r180